# Altium PCB MotherBoardwoBoxes.PcbDoc
Units mm, origin at the board's own origin, x right, y up, seen from the top; angles counter-clockwise.
Board outline 107 x 150.5 mm, 2 copper layers (Top Layer, Bottom Layer), stack 1.071 mm thick; 21 components, 70 nets, 239 pads, 87 vias.
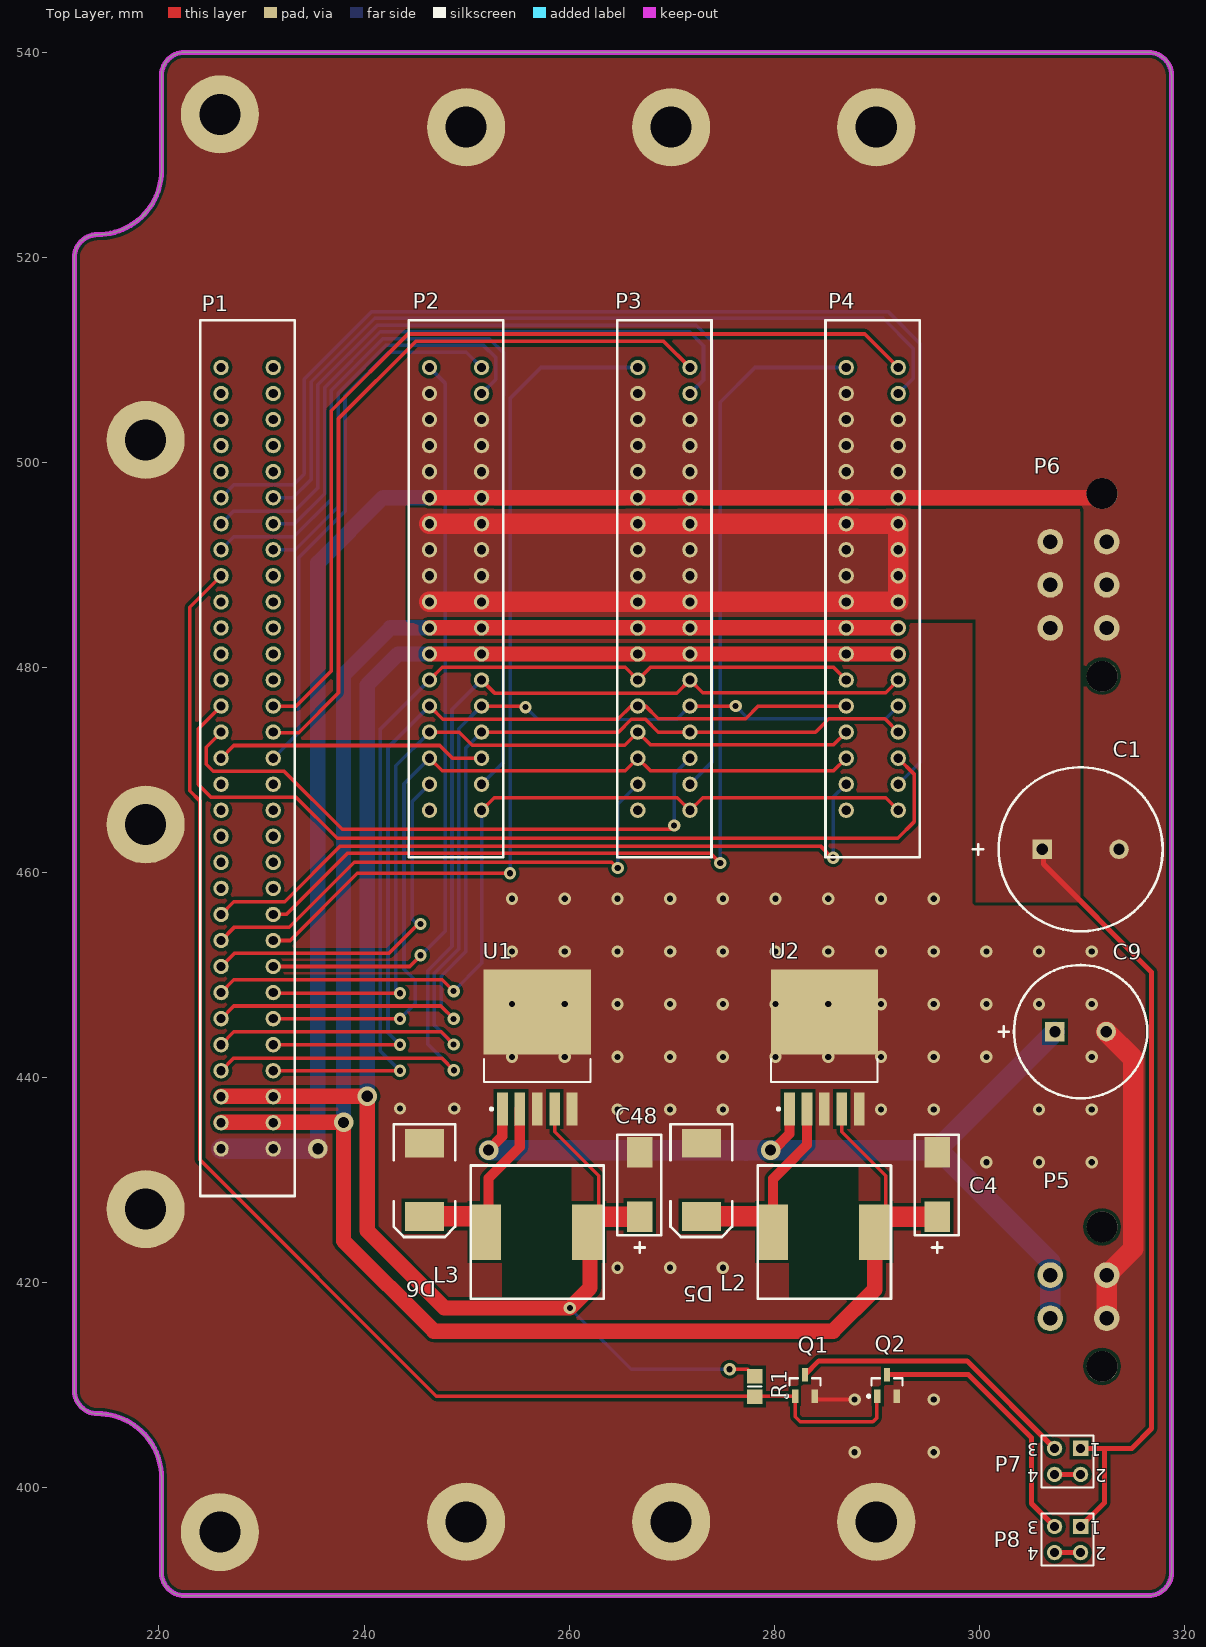
[diagram p0: Top Layer view]
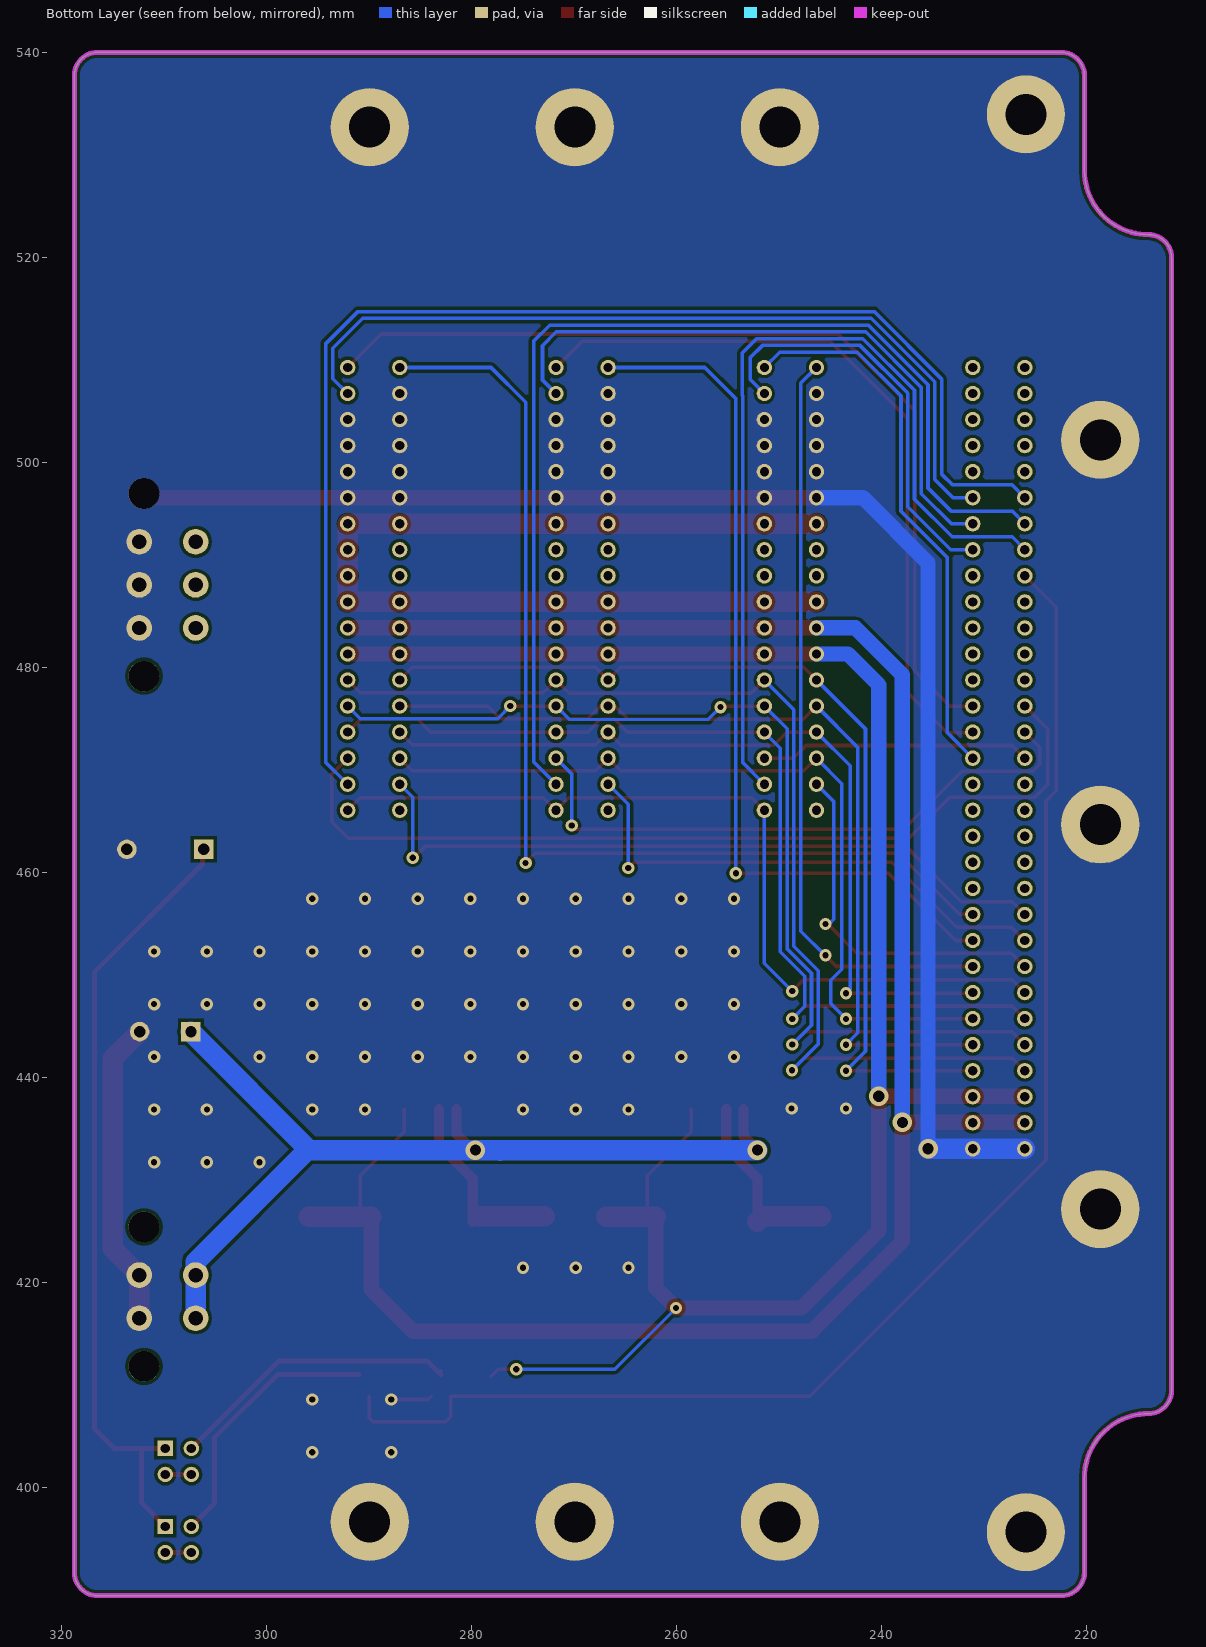
[diagram p1: Bottom Layer view, seen from below]

## Layer stack, top to bottom
Top Layer: signal copper 0.0356
Dielectric: core 1, FR-4, Dk 4.8
Bottom Layer: signal copper 0.0356

## Board outline
214,407.25 cw(c214,409.5) 211.75,409.5 211.75,519.975 cw(c214,519.975) 214,522.225 ccw(c214,528.475) 220.25,528.475 220.25,537.75 cw(c222.5,537.75) 222.5,540 316.5,540 cw(c316.5,537.75) 318.75,537.75 318.75,391.75 cw(c316.5,391.75) 316.5,389.5 222.5,389.5 cw(c222.5,391.75) 220.25,391.75 220.25,401 ccw(c214,401)

## Design rules (kind name [scope] priority, off if disabled: settings)
Clearance [All] p1: gap=0.31
Height [All] p1: minheight=0 maxheight=200 prefheight=12.7
PlaneClearance [All] p1: clearance=0.5
PlaneConnect [All] p1: planeconnectstyle=Direct reliefexpansion=0.508 reliefentries=4 reliefconductorwidth=0.254 reliefairgap=0.254
PolygonConnect [All] p1: connectstyle=Direct reliefconductorwidth=0.254 reliefentries=4 polygonreliefangle="90 Angle"
RoutingVias [All] p1: holewidth=0.9 width=1.2 viastyle="Through Hole" minholewidth=0.4 minwidth=1.2 maxholewidth=1 maxwidth=1.5
SMDNeckDown [All] p1: percent=200.000
SilkscreenOverComponentPads [All] p1: minsilkscreentomaskgap=0.254
SolderMaskExpansion [All] p1: expansion=0.102
Width [All] p1: maxlimit=5 minlimit=0.31 preferedwidth=0.35
24 further rules are at their usual default settings.

## Components (designator, comment, footprint, x,y, rotation, side; value= is the part's Value field where it differs from the comment)
C1 "Cap Pol1" Cap16x36 309.88,462.28 r0 top
C4 "Cap Pol1" "Type E" 295.89,425.95 r90 top
C9 "Cap Pol1" Cap13x25 309.88,444.5 r0 top
C48 "Cap Pol1" "Type E" 266.89,425.95 r90 top
D5 "MBRS340T3G" "SMC wbody" 272.89,426.475 r90 top
D6 "MBRS340T3G" "SMC wbody" 245.89,426.475 r90 top
L2 "Inductor" CDRH127/LD 279.89,424.95 r90 top
L3 "Inductor" CDRH127/LD 251.89,424.95 r90 top
P1 "31x2A Slot" SL-62A 231.14,433.07 r90 top locked
P2 "18x2A Slot" SL-36A 251.46,466.09 r90 top locked
P3 "18x2A Slot" SL-36A 271.78,466.09 r90 top locked
P4 "18x2A Slot" SL-36A 292.1,466.09 r90 top locked
P5 "MHDR2X2" MF-2x2 312.42,416.56 r90 top locked
P6 "MHDR2X3" MF-2x3 312.42,483.87 r90 top locked
P7 "Header 2X2" HDR2X2 309.88,403.86 r180 top
P8 "Header 2X2" HDR2X2 309.88,396.24 r180 top
Q1 "BSS123" SOT23_N 283,410 r90 top
Q2 "BSS123" SOT23_N 291,410 r90 top
R1 "Res2" RESC2012M 278.1,409.9 r90 top
U1 "LM2596S-3.3" TS5B_N 256.89,442.95 r90 top
U2 "LM2596S-5.0" TS5B_N 284.89,442.95 r90 top

## Footprints (in the part's own frame and the unit in brackets; to place one, negate y for a bottom-side part, rotate by r counter-clockwise, add the part's x,y. Pads: shape width x height; smd on the part's side, far side on the other; paste and mask are expansions set on the pad)
Cap13x25 [mm]
  rect 1.9x1.9 hole 1.1: 1(-2.5,0)
  round 1.9 hole 1.1: 2(2.5,0)
  silkscreen extent -8,-6.5 6.5,6.5, body extent -6.47,-6.5 6.47,6.47, height 25
Cap16x36 [mm]
  rect 1.9x1.9 hole 1.1: 1(-3.75,0)
  round 1.9 hole 1.1: 2(3.75,0)
  silkscreen extent -10.5,-8 8,8, body extent -7.97,-7.97 7.97,8, height 36
CDRH127/LD [mm]
  rect 5.4x2.9 smd: 1(0,0)
  rect 5.4x3 smd: 2(0,-9.9)
  Top Layer pour cut-out: -6.5,-1.6 6.5,-1.6 6.5,-8.3 -6.5,-8.3
  silkscreen extent -6.5,-11.5 6.5,1.5, body extent -6.5,-11.5 6.53,1.5, height 8
HDR2X2 [mm] "Connector; Header; 2x2 Position"
  rect 1.5x1.5 hole 0.9: 1(0,0)
  round 1.5 hole 0.9: 2(0,2.54) 3(2.54,0) 4(2.54,2.54)
  silkscreen extent -1.27,-1.27 3.81,3.81
MF-2x2 [mm] "4 pin Mini-Fit Connector"
  round 3 hole 3: 0(-4.7,0.45) 0(8.9,0.45)
  round 2.5 hole 1.4: 1(0,0) 2(4.2,0) 3(4.2,5.5) 4(0,5.5)
  body extent -6.05,-2.7 10.34,7.55, height 12.8
MF-2x3 [mm] "6 pin Mini-Fit Connector"
  round 3 hole 3: 0(-4.7,0.45) 0(13.1,0.45)
  round 2.5 hole 1.4: 1(0,0) 2(4.2,0) 3(8.4,0) 4(8.4,5.5) 5(4.2,5.5) 6(0,5.5)
  body extent -6.05,-2.7 14.48,7.55, height 12.8
RESC2012M [mm] "Chip Resistor, Body 2.0x1.2mm, IPC Low Density"
  rect 1.4x1.5 smd: 1(-1,0) 2(1,0)
  silkscreen extent 0,-0.65 0,0.65, body extent -1.07,-0.7 1.07,0.7, height 0.7
SL-36A [mm] "Mother Slot"
  round 1.5 hole 0.9: 1(0,0) 2(2.54,0) 3(5.08,0) 4(7.62,0) 5(10.16,0) 6(12.7,0) 7(15.24,0) 8(17.78,0) 9(20.32,0) 10(22.86,0) 11(25.4,0) 12(27.94,0) 13(30.48,0) 14(33.02,0) 15(35.56,0) 16(38.1,0) 17(40.64,0) 18(43.18,0) 19(0,5.08) 20(2.54,5.08) 21(5.08,5.08) 22(7.62,5.08) 23(10.16,5.08) 24(12.7,5.08) 25(15.24,5.08) 26(17.78,5.08) 27(20.32,5.08) 28(22.86,5.08) 29(25.4,5.08) 30(27.94,5.08) 31(30.48,5.08) 32(33.02,5.08) 33(35.56,5.08) 34(38.1,5.08) 35(40.64,5.08) 36(43.18,5.08)
  silkscreen extent -4.6,-2.1 47.8,7.1, body extent -4.6,-2.1 47.8,7.1, height 16.1
SL-62A [mm] "Mother Slot"
  round 1.5 hole 0.9: 1(0,0) 2(2.54,0) 3(5.08,0) 4(7.62,0) 5(10.16,0) 6(12.7,0) 7(15.24,0) 8(17.78,0) 9(20.32,0) 10(22.86,0) 11(25.4,0) 12(27.94,0) 13(30.48,0) 14(33.02,0) 15(35.56,0) 16(38.1,0) 17(40.64,0) 18(43.18,0) 19(45.72,0) 20(48.26,0) 21(50.8,0) 22(53.34,0) 23(55.88,0) 24(58.42,0) 25(60.96,0) 26(63.5,0) 27(66.04,0) 28(68.58,0) 29(71.12,0) 30(73.66,0) 31(76.2,0) 32(0,5.08) 33(2.54,5.08) 34(5.08,5.08) 35(7.62,5.08) 36(10.16,5.08) 37(12.7,5.08) 38(15.24,5.08) 39(17.78,5.08) 40(20.32,5.08) 41(22.86,5.08) 42(25.4,5.08) 43(27.94,5.08) 44(30.48,5.08) 45(33.02,5.08) 46(35.56,5.08) 47(38.1,5.08) 48(40.64,5.08) 49(43.18,5.08) 50(45.72,5.08) 51(48.26,5.08) 52(50.8,5.08) 53(53.34,5.08) 54(55.88,5.08) 55(58.42,5.08) 56(60.96,5.08) 57(63.5,5.08) 58(66.04,5.08) 59(68.58,5.08) 60(71.12,5.08) 61(73.66,5.08) 62(76.2,5.08)
  silkscreen extent -4.6,-2.1 80.8,7.1, body extent -4.6,-2.1 80.8,7.1, height 16.1
"SMC wbody" [mil]
  rect 110x150 smd: 1(280.51,0) 2(0,0)
  silkscreen extent -79,-118 354,118, body extent 0,-118 276,118, height 84
SOT23_N [mm] "SOT23, 3-Leads, Body 2.9x1.3mm, Pitch 0.95mm, Lead Span 2.3mm, IPC Medium Density"
  rect 1.3x0.6 smd: 1(-1.05,0.95) 2(-1.05,-0.95) 3(1.05,0)
  silkscreen extent -1.17,-1.5 0.7,1.92, body extent -0.7,-1.5 0.7,1.5, height 1.1
TS5B_N [mm] "D2-PAK, 6-Leads, Body 8.6x10.2mm, Pitch 1.7mm, Lead Span 14.1mm, IPC Medium Density"
  rect 3.2x1.05 smd: 1(-6,3.4) 2(-6,1.7) 3(-6,0) 4(-6,-1.7) 5(-6,-3.4)
  rect 8.3x10.45 smd: 6(3.45,0)
  silkscreen extent -6.12,-5.2 -1.1,5.2, body extent -3.35,-5.2 6.05,5.2, height 4.65
"Type E" [mm] "Tantal capacitor"
  rect 3x2.5 smd: 1(0.5,0) 2(6.8,0)
  silkscreen extent -3,-2.1 8.5,2.2, body extent 0,-2.15 7.3,2.15, height 4

## Part data
C1 C4 C9 C48: "Polarized Capacitor (Radial)"
D5 D6: library part 30BQ100, "Schottky Rectifier"
P1: "31x2 Slot"
P5 P7 P8: "Header, 2-Pin, Dual row"
P6: "Header, 3-Pin, Dual row"
Q1 Q2: "N-channel Enhancement Mode Vertical D-MOSFET"
R1: "Resistor"
U1 U2: "SIMPLE SWITCHER Power Converter 150 KHz 3A Step-Down Voltage Regulator"

## Free pads (board coordinates)
  round 7.62 hole 4: 0(218.7,427.2) 0(218.7,464.7) 0(218.7,502.2) 0(225.95,395.7) 0(225.95,533.95) 0(249.95,396.7) 0(249.95,532.7) 0(269.95,396.7) 0(269.95,532.7) 0(289.95,396.7) 0(289.95,532.7)

## Via types
v1: diameter 1.2, hole 0.6, Top Layer to Bottom Layer, 82 vias
v2: diameter 1.9, hole 1.1, Top Layer to Bottom Layer, 5 vias

## Nets (pads, with @x,y where several pads share a name; then routed paths per layer and width w, separated by ;. In a path a pad name is that pad's centre, name@x,y a point inside that pad or via, vN(x,y) a via of type N, cw(c..) or ccw(c..) an arc to the next point about the centre after c; other vN are vias at no path point)
+3.3V: C48.1 L3.2 P1.3 P1.34 P2.7 P2.25 P3.7 P3.25 P4.7 P4.25 R1.2 U1.4 | length 191.9
  Top Layer w0.254: L3.2@262.04,425.95 L3.2@262.89,426.8
  Top Layer w0.31: v1(275.65,411.575) 277.425,411.575 R1.2
  Top Layer w0.35: U1.4 258.59,434.75 262.89,430.45 L3.2@262.89,426.8
  Top Layer w1.5: P1.34@226.06,438.19 v2(240.3,438.19) 240.3,425.09 247.84,417.55 v1(260.07,417.55) 262.04,419.52 L3.2@262.04,426.45 ; P2.25 P4.7
  Top Layer w2: L3.2@262.04,426.45 C48.1
  Bottom Layer w0.31: v1(260.07,417.55) 266.045,411.575 v1(275.65,411.575)
  Bottom Layer w1.5: v2(240.3,438.19) 240.3,478.31 243.32,481.33 P2.25
+5V: C4.1 L2.2 P1.2 P1.33 P2.8 P2.26 P3.8 P3.26 P4.8 P4.26 U2.4 | length 206.7
  Top Layer w0.254: L2.2@289.79,425.95 L2.2@290.89,427.05
  Top Layer w0.35: U2.4 286.59,434.75 290.89,430.45 L2.2@290.89,427.05
  Top Layer w1.5: P1.33@226.06,435.65 v2(238,435.65) 238,424.09 246.8,415.29 285.75,415.29 289.79,419.33 L2.2@289.79,426.45 ; P2.26 P4.8
  Top Layer w2: L2.2@289.79,426.45 C4.1
  Bottom Layer w1.5: v2(238,435.65) 238,479.3 242.57,483.87 P2.26
+30: C1.1 P2.9 P2.10 P2.11 P2.12 P2.27 P2.28 P2.29 P2.30 P3.9 P3.10 P3.11 P3.12 P3.27 P3.28 P3.29 P3.30 P4.9 P4.10 P4.11 P4.12 P4.27 P4.28 P4.29 P4.30 P6.4 P6.5 P6.6 P7.1 P8.1 | length 176.2
  Top Layer w0.5: C1.1@306.257,462.407 306.257,460.843 316.8,450.3 316.8,405.8 314.86,403.86 312.2,403.86 P7.1 ; P8.1 312.2,398.56 312.2,403.7
  Top Layer w2: P2.27 P4.9 P4.12 P2.30
DRV_DIR_A: P1.39 P2.20 | length 35.5
  Top Layer w0.35: P1.39 227.36,452.15 242.44,452.15 v1@245.24,454.95
  Bottom Layer w0.35: v1@245.2,454.95 244.7,455.45 244.7,466.95 P2.20
  other v1: 245.5,455
DRV_DIR_B: P1.40 P3.20 | length 51.1
  Top Layer w0.35: P1.40 227.37,454.7 230.623,454.7 230.628,454.695 232.695,454.695 239.035,461.035 264.155,461.035 v1(264.74,460.45)
  Bottom Layer w0.35: v1(264.74,460.45) 264.74,466.67 P3.20
DRV_DIR_C: P1.41 P4.20 | length 70.6
  Top Layer w0.35: P1.41 227.295,457.165 232.255,457.165 237.69,462.6 284.513,462.6 285.659,461.454 v1(285.744,461.454)
  Bottom Layer w0.35: v1@285.74,461.45 285.74,467.35 P4.20
DRV_DIR_D: P1.42
DRV_DIR_E: P1.43
DRV_DIR_F: P1.44
DRV_DIR_G: P1.45
DRV_DIR_H: P1.46
DRV_ENA_A: P1.47 P2.3 | length 26.4
  Top Layer w0.35: P1.47 227.295,472.405 247.395,472.405 248.63,471.17 P2.3
DRV_ENA_B: P1.48 P3.3 | length 59.4
  Top Layer w0.35: P1.48 224.6,472.25 224.6,470.59 225.29,469.9 232.19,469.9 237.865,464.225 269.89,464.225 v1@270.24,464.575
  Bottom Layer w0.35: v1(270.24,464.6) 270.24,469.63 P3.3
DRV_ENA_C: P1.49 P4.3 | length 88.1
  Top Layer w0.35: P1.49 223.832,474.022 223.832,468.608 225.065,467.375 233.35,467.375 237.375,463.35 284.697,463.35 292.04,463.35 293.64,464.95 293.64,469.63 P4.3
DRV_ENA_D: P1.50
DRV_ENA_E: P1.51
DRV_ENA_F: P1.52
DRV_ENA_G: P1.53
DRV_ENA_H: P1.54 Q1.1 Q2.1 R1.1 | length 138.7
  Top Layer w0.254: Q2.1@290,408.9 Q2.1
  Top Layer w0.35: P1.54 223,485.89 223,468 224,467 224,432 247.05,408.95 Q1.1 282.05,406.95 282.55,406.45 289.625,406.45 290,406.825 Q2.1@290,408.9
DRV_MS1: P1.7 P2.22 P3.22 P4.22 | length 82
  Top Layer w0.35: P1.7@231.2,448.25 v1(243.5,448.25) ; P2.22 249.29,473.71 250.56,472.44 265.43,472.44 P3.22 267.935,472.475 285.785,472.475 P4.22
  Bottom Layer w0.35: v1(243.5,448.25) 243.1,448.65 243.1,470.43 P2.22
DRV_MS2: P1.6 P2.21 P3.21 P4.21 | length 82.6
  Top Layer w0.35: P1.6@231.14,445.75 v1(243.5,445.75) ; P2.21 247.615,469.935 265.465,469.935 P3.21 267.935,469.935 285.785,469.935 P4.21
  Bottom Layer w0.35: v1(243.5,445.75) 245,447.25 245,449.5 243.9,450.6 243.9,468.69 P2.21
DRV_RESET: P1.38 P2.1 P3.1 P4.1 | length 85.1
  Top Layer w0.35: P1.38 227.3,449.55 247.64,449.55 v1(248.74,448.45) ; P2.1 252.695,467.325 270.545,467.325 P3.1 273.015,467.325 290.865,467.325 P4.1
  Bottom Layer w0.35: v1(248.74,448.45) 251.46,451.17 P2.1
DRV_SLEEP: P1.37 P2.4 P3.4 P4.4 | length 96.5
  Top Layer w0.35: P1.37 227.295,447.005 247.485,447.005 v1(248.74,445.75) ; P2.4 264.41,473.71 264.81,473.71 266.05,474.95 267.45,474.95 268.69,473.71 P3.4 284.02,473.71 285.325,475.015 290.795,475.015 P4.4
  Bottom Layer w0.35: v1@248.7,445.79 247.525,446.965 247.525,449.91 249.9,452.285 249.9,472.15 P2.4
DRV_STEP_A: P1.55 P2.2 | length 85.8
  Bottom Layer w0.35: P1.55 226.06,491.51 227.3,492.75 233.15,492.75 236.82,496.42 236.82,507.047 241.853,512.08 252.22,512.08 253.6,510.7 253.6,506.543 253.58,506.523 253.58,470.75 P2.2
DRV_STEP_B: P1.56 P3.2 | length 106.6
  Bottom Layer w0.35: P1.56 227.295,495.265 233.255,495.265 235.5,497.51 235.5,507.594 241.306,513.4 272.4,513.4 273.94,511.86 273.94,511.8 273.94,470.79 P3.2
DRV_STEP_C: P1.57 P4.2 | length 126.3
  Bottom Layer w0.35: P1.57 227.34,497.85 233.14,497.85 234.18,498.89 234.18,508.141 240.759,514.72 291.095,514.72 294.252,511.563 294.252,470.782 P4.2
DRV_STEP_D: P1.58
DRV_STEP_E: P1.59
DRV_STEP_F: P1.60
DRV_STEP_G: P1.61
DRV_STEP_H: P1.62
GND: C1.2 C4.2 C9.2 C48.2 D5.1 D6.1 P1.1 P1.32 P2.13 P2.14 P2.15 P2.16 P2.31 P2.32 P2.33 P2.34 P2.35 P3.13 P3.14 P3.15 P3.16 P3.31 P3.32 P3.33 P3.34 P3.35 P4.13 P4.14 P4.15 P4.16 P4.31 P4.32 P4.33 P4.34 P4.35 P5.1 P5.2 P6.0@311.97,496.97 P6.1 P6.2 P6.3 pad.0 Q1.2 Q2.2 U1.3 U1.5 U1.6 U2.3 U2.5 U2.6 | length 179.9
  Top Layer w0.35: Q1.2 284.27,408.63 v1(287.84,408.63)
  Top Layer w1.5: P2.31 P4.13 P6.0@312.106,496.57
  Top Layer w2: C9.2 315,441.88 315,423.34 P5.2 ; P5.1 P5.2@312.42,420.7
  Bottom Layer w1.5: v2(235.5,433.07) 235.5,490.21 241.86,496.57 P2.31
  Bottom Layer w2: P1.32 P1.1 v2(235.5,433.07)
  other v1: 287.84,403.49 295.55,403.49 295.55,408.63 264.71,421.48 269.85,421.48 274.99,421.48 300.69,431.76 305.83,431.76 310.97,431.76 264.71,436.9 269.85,436.9 274.99,436.9 290.41,436.9 295.55,436.9 305.83,436.9 310.97,436.9 243.5,437 248.8,437 254.43,442.04 259.57,442.04 264.71,442.04 269.85,442.04 274.99,442.04 280.13,442.04 285.27,442.04 290.41,442.04 295.55,442.04 300.69,442.04 310.97,442.04 254.43,447.18 259.57,447.18 264.71,447.18 269.85,447.18 274.99,447.18 280.13,447.18 285.27,447.18 290.41,447.18 295.55,447.18 300.69,447.18 305.83,447.18 310.97,447.18 254.43,452.32 259.57,452.32 264.71,452.32 269.85,452.32 274.99,452.32 280.13,452.32 285.27,452.32 290.41,452.32 295.55,452.32 300.69,452.32 305.83,452.32 310.97,452.32 254.43,457.46 259.57,457.46 264.71,457.46 269.85,457.46 274.99,457.46 280.13,457.46 285.27,457.46 290.41,457.46 295.55,457.46
NetC9_1: C9.1 P5.3 P5.4 U1.1 U2.1 | length 90.7
  Top Layer w1: v2(252.14,432.95) 253.49,434.3 U1.1 ; v2(279.64,432.95) 279.89,432.95 281.49,434.55 U2.1
  Bottom Layer w2: v2(252.14,432.95) 277.19,432.95 ; 277.24,432.9 277.19,432.95 ; 295.83,432.95 C9.1 ; P5.4 306.92,422.06 296.03,432.95 277.19,432.95
NetD5_2: D5.2 L2.1 U2.2 | length 19.6
  Top Layer w1: L2.1@279.365,426.475 279.89,425.95 279.89,430.15 281.011,431.271 283.19,433.45 U2.2
  Top Layer w2: D5.2 L2.1@279.365,426.475
NetD6_2: D6.2 L3.1 U1.2 | length 18.7
  Top Layer w1: L3.1@252.14,425.95 252.14,430.2 255.19,433.25 U1.2
  Top Layer w2: D6.2 251.615,426.475 L3.1@252.14,425.95
NetP2_19: P2.19
NetP3_19: P3.19
NetP4_19: P4.19
NetP7_2: P7.2 P7.4 | length 2.5
  Top Layer w0.5: P7.4 P7.2
NetP7_3: P7.3 Q1.3 | length 28.9
  Top Layer w0.254: Q1.3 Q1.3@283,411.5
  Top Layer w0.5: Q1.3 284.35,412.4 298.8,412.4 P7.3
NetP8_2: P8.2 P8.4 | length 2.5
  Top Layer w0.5: P8.4 P8.2
NetP8_3: P8.3 Q2.3 | length 26.2
  Top Layer w0.5: Q2.3 298.95,411.05 305.1,404.9 305.1,398.48 P8.3
NULL_A: P1.8 P2.36 | length 73.8
  Top Layer w0.35: P1.8 244.45,450.85 v1@245.525,451.925
  Bottom Layer w0.35: v1@245.55,451.95 247.9,454.3 247.9,507.75 P2.36
  other v1: 245.5,451.95
NULL_B: P1.9 P3.36 | length 85.8
  Top Layer w0.35: P1.9 232.79,453.39 239.35,459.95 v1(254.24,459.95)
  Bottom Layer w0.35: v1(254.24,459.95) 254.24,506.25 257.26,509.27 P3.36
NULL_C: P1.10 P4.36 | length 105.1
  Top Layer w0.35: P1.10 232.42,455.93 238.39,461.9 273.79,461.9 v1(274.74,460.95)
  Bottom Layer w0.35: v1(274.74,460.95) 274.74,505.89 278.12,509.27 P4.36
NULL_D: P1.11
NULL_E: P1.12
NULL_F: P1.13
NULL_G: P1.14
NULL_H: P1.15
POS_A: P1.24 P2.17 | length 41
  Bottom Layer w0.35: P1.24 233.28,491.49 237.48,495.69 237.48,506.774 242.126,511.42 251.652,511.42 252.832,510.24 252.832,508.102 P2.17
POS_B: P1.25 P3.17 | length 61.5
  Bottom Layer w0.35: P1.25 233.22,494.03 236.16,496.97 236.16,507.321 241.579,512.74 271.75,512.74 273.1,511.39 273.1,508.05 P3.17
POS_C: P1.26 P4.17 | length 81.4
  Bottom Layer w0.35: P1.26 233.06,496.57 234.84,498.35 234.84,507.867 241.033,514.06 290.64,514.06 293.54,511.16 293.54,508.17 P4.17
POS_D: P1.27
POS_D_A: P1.16 P2.18 | length 53.9
  Bottom Layer w0.35: P1.16 233.64,473.67 233.64,490.74 238.14,495.24 238.14,506.501 242.399,510.76 249.97,510.76 P2.18
POS_D_B: P1.17 P3.18 | length 73.2
  Top Layer w0.254: P1.17 P1.17@231.2,473.65
  Top Layer w0.35: P1.17@231.2,473.65 233.62,473.65 237.508,477.538 237.508,504.29 245.028,511.81 269.24,511.81 P3.18
POS_D_C: P1.18 P4.18 | length 92.2
  Top Layer w0.35: P1.18 233.386,476.25 236.8,479.664 236.8,505.055 244.279,512.534 288.836,512.534 P4.18
POS_D_D: P1.19
POS_D_E: P1.20
POS_D_F: P1.21
POS_D_G: P1.22
POS_D_H: P1.23
POS_E: P1.28
POS_F: P1.29
POS_G: P1.30
POS_H: P1.31
SPI_SCK: P1.35 P2.6 P3.6 P4.6 | length 107.7
  Top Layer w0.35: P1.35 227.295,441.925 247.565,441.925 v1(248.761,440.729) ; P2.6 252.672,477.578 252.75,477.5 270.49,477.5 P3.6 273.015,477.555 290.865,477.555 P4.6
  Bottom Layer w0.35: v1(248.761,440.729) 246.2,443.29 246.2,450.451 248.58,452.831 248.58,475.91 P2.6
SPI_SDI: P1.5 P2.23 P3.23 P4.23 | length 90.3
  Top Layer w0.35: P1.5 v1(243.5,443.23) ; P2.23 247.68,474.95 264.75,474.95 266.05,476.25 267.45,476.25 268.685,475.015 277.215,475.015 278.45,476.25 P4.23
  Bottom Layer w0.35: v1(243.5,443.23) 242.34,444.39 242.34,472.21 P2.23
SPI_SDO: P1.36 P2.5 P3.5 P4.5 | length 102.4
  Top Layer w0.35: P1.36 227.305,444.475 247.515,444.475 v1(248.74,443.25) ; P2.5 v1@256.04,476.25 ; P3.5 v1(276.24,476.25)
  Bottom Layer w0.31: 256.94,474.95 270.48,474.95
  Bottom Layer w0.35: v1(248.74,443.25) 246.865,445.125 246.865,450.183 249.24,452.558 249.24,474.03 P2.5 ; v1(255.74,476.15) 256.94,474.95 ; 270.48,474.95 P3.5 ; v1(276.24,476.25) 277.475,475.015 290.865,475.015 P4.5
SPI_SEL: P1.4 P2.24 P3.24 P4.24 | length 95.9
  Top Layer w0.35: P1.4 v1(243.5,440.69) ; P2.24 247.615,480.025 265.465,480.025 P3.24 267.935,480.025 285.785,480.025 P4.24
  Bottom Layer w0.35: v1(243.5,440.69) 241.6,442.59 241.6,474.01 P2.24
pads on no net: P5.0 P6.0@311.97,479.17

## Polygon pours and split planes (outlines as drawn)
GND on Bottom Layer "Bottom Layer-No Net 2" (solid, remove dead copper, pour order 1000): 211.448,409.59 211.448,520.34 cw(c213.949,520.34) 213.791,522.835 cw(c213.945,522.637) 213.927,522.887 ccw(c213.469,529.08) 219.678,529.08 cw(c219.929,529.08) 219.712,529.206 219.698,537.839 cw(c219.949,537.84) 219.698,537.84 cw(c222.199,537.84) 222.199,540.34 316.449,540.34 cw(c316.449,537.84) 318.949,537.84 318.949,391.84 cw(c316.449,391.84) 316.449,389.339 cw(c316.449,389.59) 316.447,389.339 222.449,389.339 cw(c222.449,391.84) 219.948,391.84 219.948,401.09 ccw(c213.949,401.09) 213.949,407.089 cw(c213.949,409.59)
+30 on Top Layer "Bottom Layer-No Net" (solid, remove dead copper, pour order 1000): 244.36,495.6 244.36,484.7 309.8,484.7 309.8,495.6
+30 on Top Layer "Top Layer-No Net" (solid, remove dead copper, pour order 1000): 309.828,495.222 309.828,457.122 299.668,457.122 299.668,495.222
GND on Top Layer "Top Layer-No Net 2" (solid, remove dead copper, pour order 1001): 211.418,409.358 211.418,520.108 cw(c213.919,520.108) 213.761,522.603 cw(c213.915,522.405) 213.897,522.655 ccw(c213.439,528.848) 219.648,528.848 cw(c219.899,528.848) 219.682,528.973 219.668,537.607 cw(c219.919,537.608) 219.668,537.608 cw(c222.169,537.608) 222.169,540.108 316.419,540.108 cw(c316.419,537.608) 318.919,537.608 318.919,391.608 cw(c316.419,391.608) 316.419,389.107 cw(c316.419,389.358) 316.417,389.107 222.419,389.107 cw(c222.419,391.608) 219.918,391.608 219.918,400.858 ccw(c213.919,400.858) 213.919,406.857 cw(c213.919,409.358)

## Keep-outs
Keep-Out Layer:
  lines w0.5: 220.25,537.725 220.25,528.475 cw(c214,528.475) 214,522.225 ccw(c214,519.975) 211.75,519.975 211.75,409.5 ccw(c214,409.5) 214,407.25 cw(c214,401) 220.25,401 220.25,391.75 ccw(c222.5,391.75) 222.5,389.5 316.5,389.5 ccw(c316.5,391.75) 318.75,391.75 318.75,537.75 ccw(c316.5,537.75) 316.5,540 222.5,540 ccw(c222.5,537.75) 220.25,537.75

## Silkscreen, mask and mechanical layers (free items; w line width, h text height)
Mechanical 1:
  lines w0.1: 220.25,537.725 220.25,528.475 cw(c214,528.475) 214,522.225 ccw(c214,519.975) 211.75,519.975 211.75,409.5 ccw(c214,409.5) 214,407.25 cw(c214,401) 220.25,401 220.25,391.75 ccw(c222.5,391.75) 222.5,389.5 316.5,389.5 ccw(c316.5,391.75) 318.75,391.75 318.75,537.75 ccw(c316.5,537.75) 316.5,540 222.5,540 ccw(c222.5,537.75) 220.25,537.75

## Text inside footprints (layer, text, board x,y; h text height)
P7: Top Overlay "3" at 305.816,404.368 h1.27 r180; Top Overlay "4" at 305.816,401.828 h1.27 r180; Top Overlay "2" at 312.42,401.828 h1.27 r180; Top Overlay "1" at 311.912,404.368 h1.27 r180
P8: Top Overlay "3" at 305.816,396.748 h1.27 r180; Top Overlay "4" at 305.816,394.208 h1.27 r180; Top Overlay "2" at 312.42,394.208 h1.27 r180; Top Overlay "1" at 311.912,396.748 h1.27 r180